# Altium PCB GeekIMUv1.PcbDoc
Units mil, origin at the board's own origin, x right, y up, seen from the top; angles counter-clockwise.
Board outline 1595.03 x 1400.03 mil, 2 copper layers (Top Layer, Bottom Layer); 42 components, 42 nets, 184 pads, 53 vias.
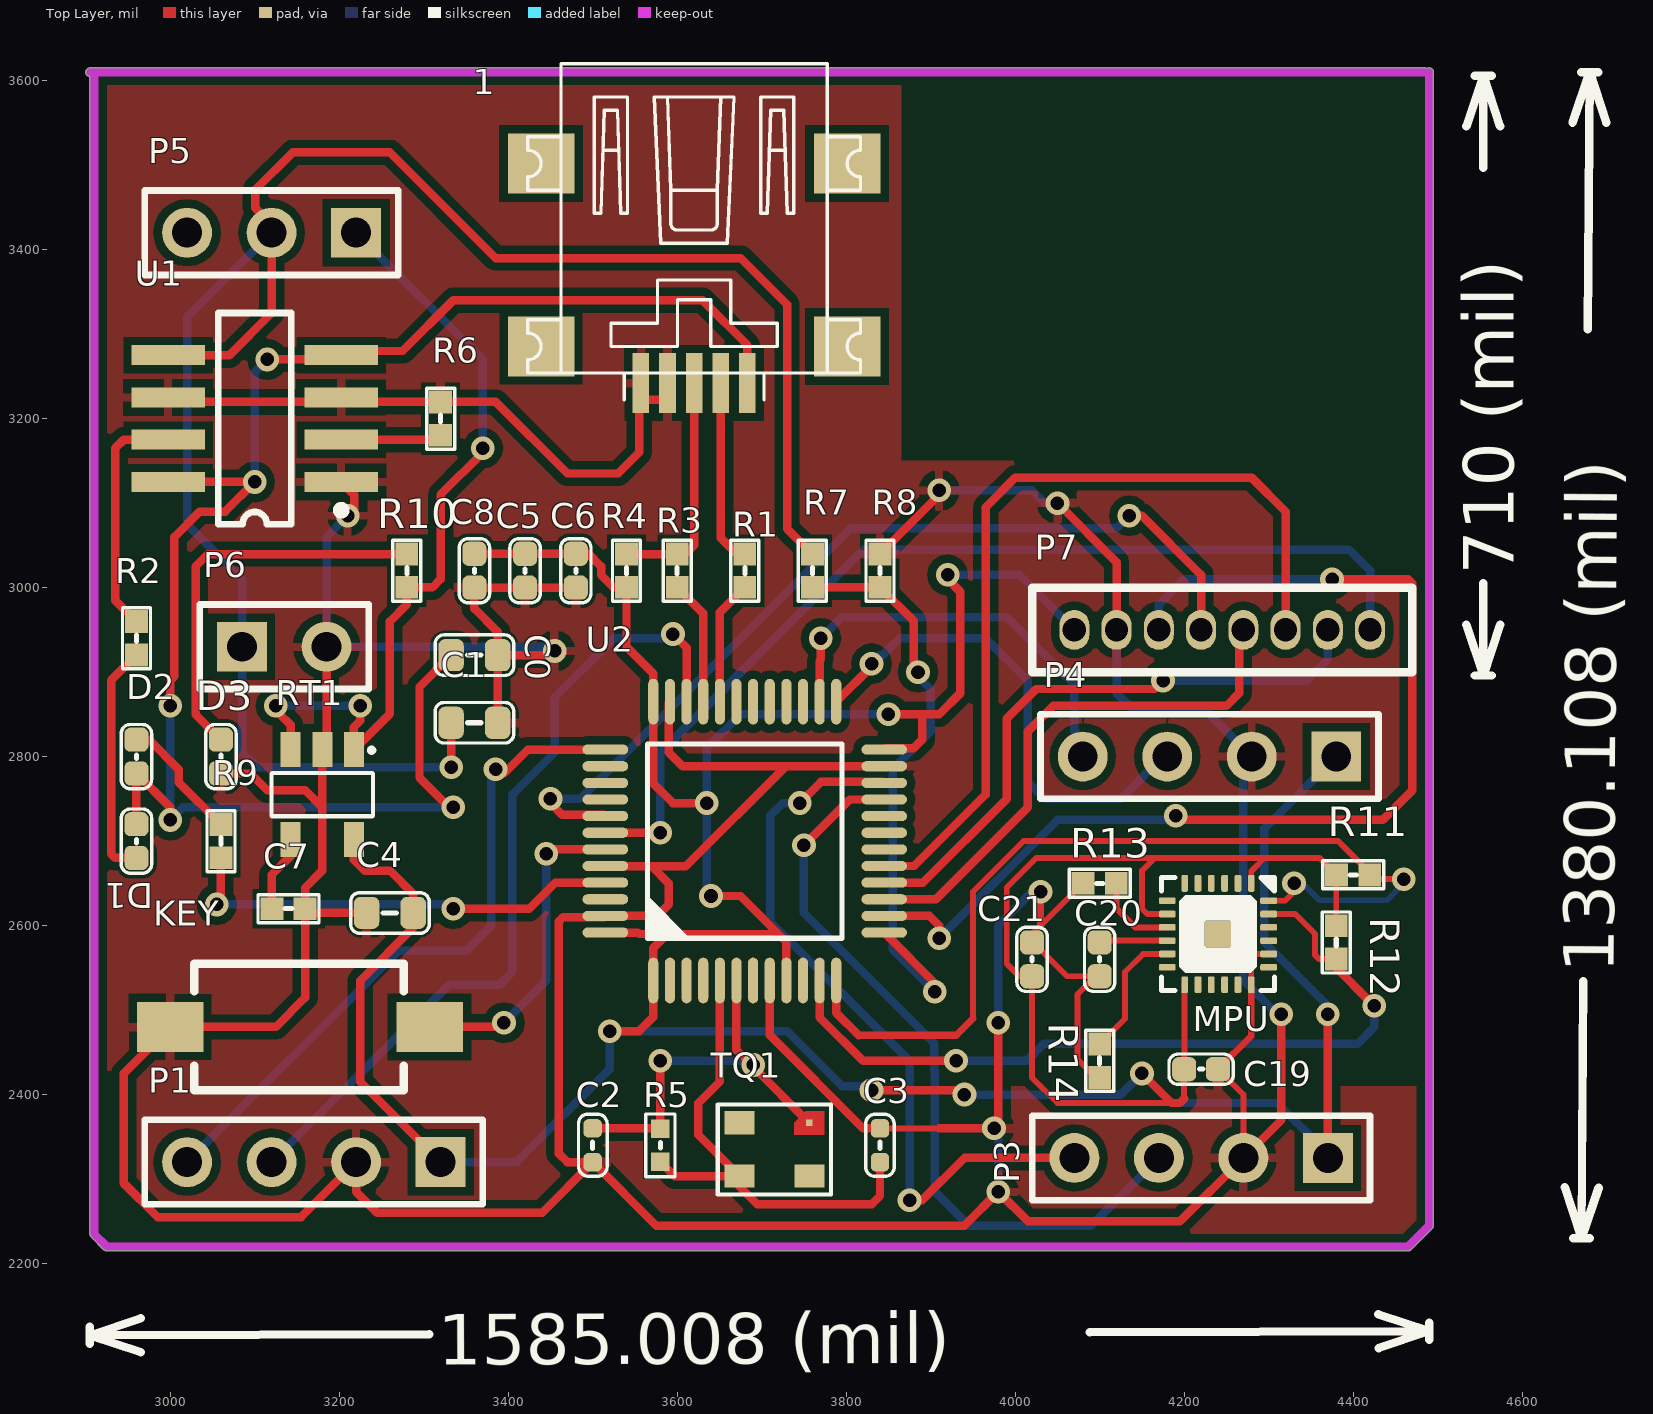
[diagram p0: Top Layer view]
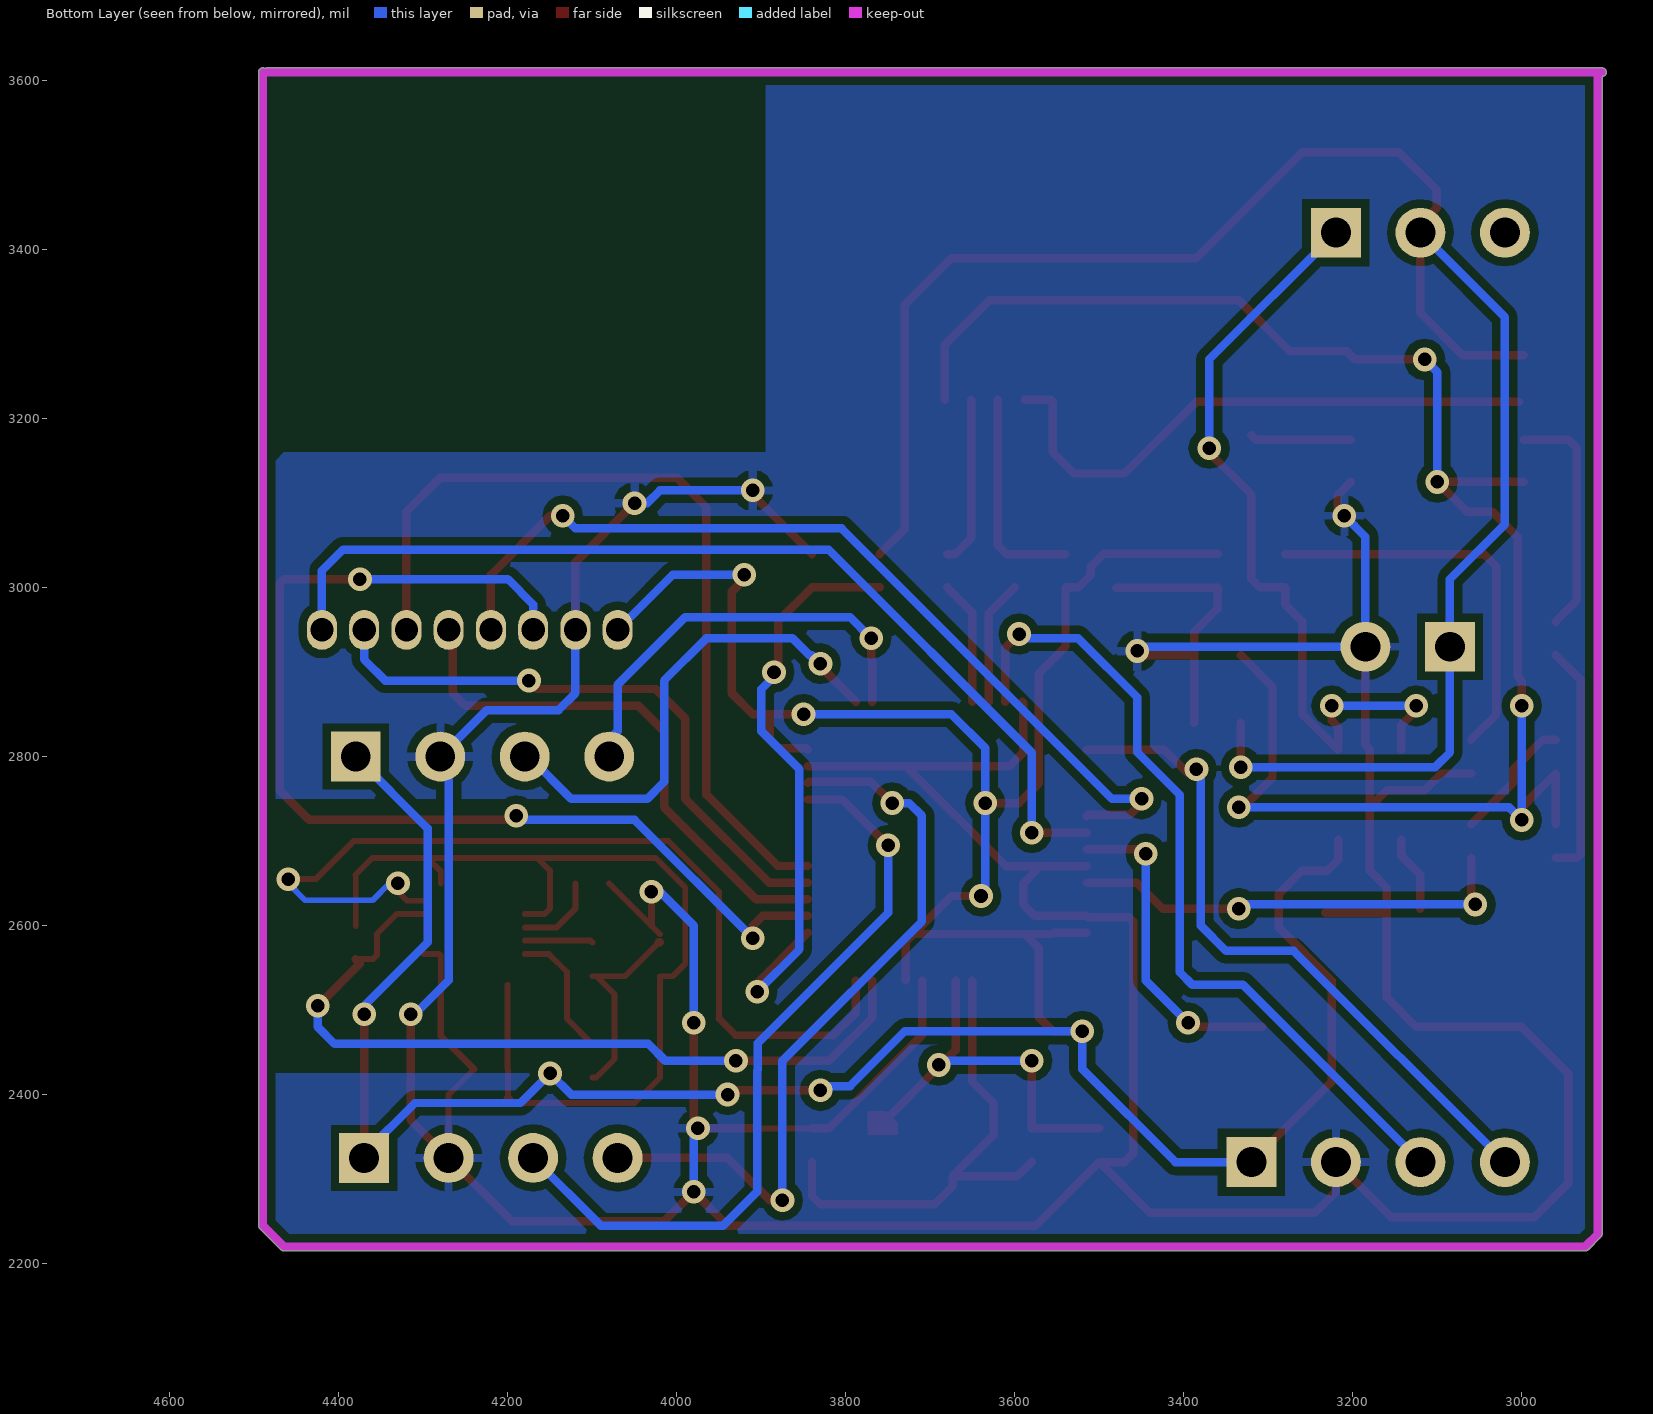
[diagram p1: Bottom Layer view, seen from below]
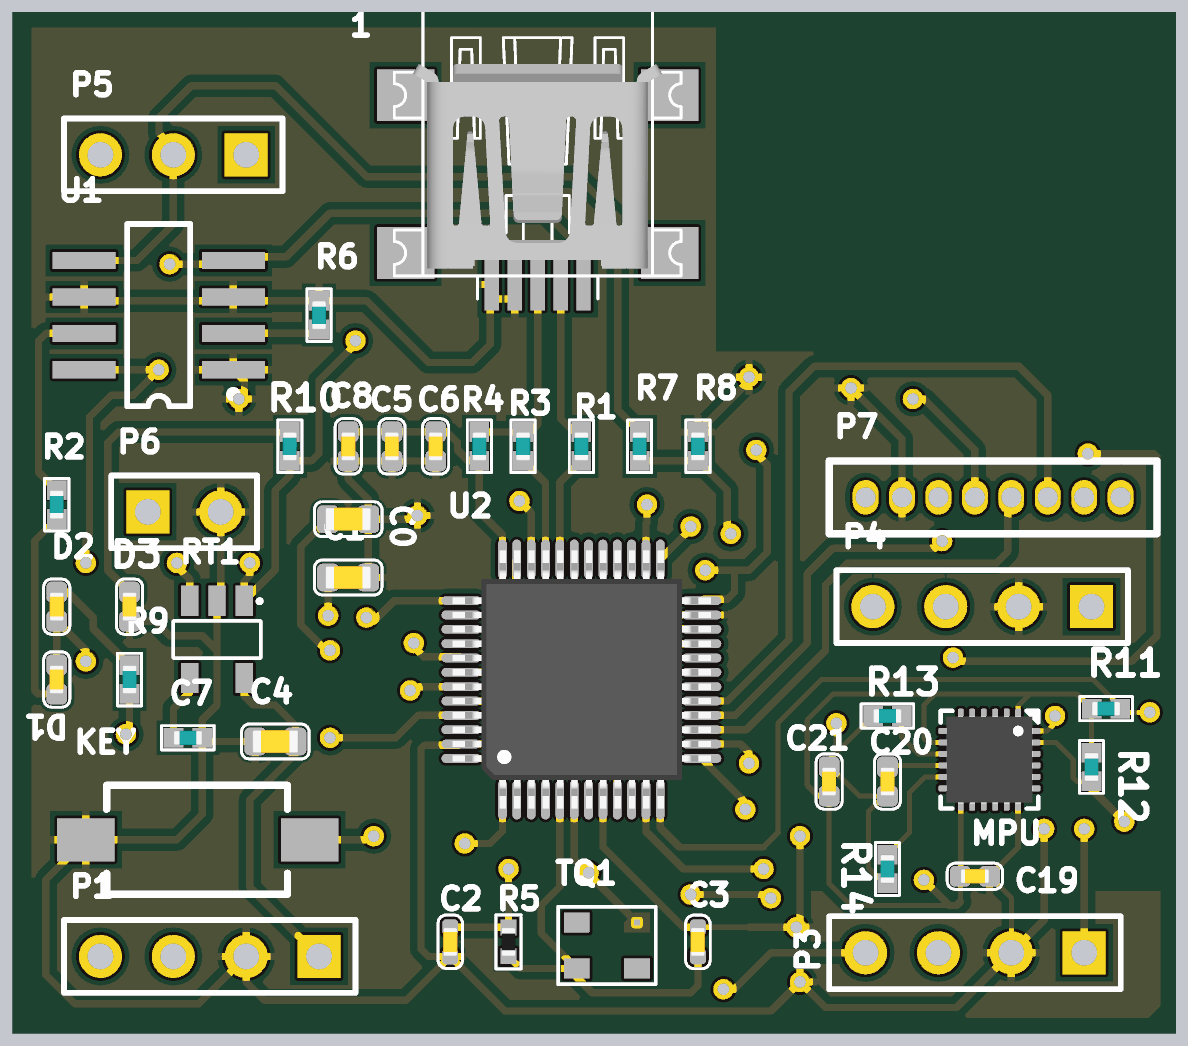
[diagram p2: 3D render of the assembled board from above, using the file's embedded part models]

## Layer stack, top to bottom
Top Layer: signal copper 1.4
Dielectric: dielectric 12.6, FR-4, Dk 4.8
Bottom Layer: signal copper 1.4

## Board outline
2906.47,2231.44 cw(c2910,2235) 2904.99,2235 2904.99,3604.99 cw(c2905,3610) 2905,3615.01 4485,3615.01 cw(c4485,3610) 4487.5,3614.35 cw(c4490,3610) 4495.02,3610 4495.02,2245 cw(c4490,2245) 4493.53,2241.44 4493.55,2241.45 4468.55,2216.45 4468.56,2216.47 cw(c4465,2220) 4465,2214.99 2925,2214.99 cw(c2925,2220) 2921.44,2216.47 2921.45,2216.45

## Design rules (kind name [scope] priority, off if disabled: settings)
Clearance [All] p1: gap=10
PolygonConnect [All] p1: connectstyle=Relief reliefconductorwidth=10 reliefentries=4 polygonreliefangle="90 Angle"
RoomDefinition USB通信 [InComponentClass('USB通信')] p1: confinementstyle=ConfineIn formatcopy=TRUE lockcomponents=FALSE outline 0,0 2000,0 2000,1000 0,1000
RoutingVias [All] p1: holewidth=16 width=28 viastyle="Through Hole" minholewidth=16 minwidth=28 maxholewidth=16 maxwidth=28
SilkscreenOverComponentPads [All] p1: minsilkscreentomaskgap=10
SolderMaskExpansion [All] p1: expansion=4
TestPointUsage [All] p1: valid=0 allowmultiple=FALSE
Testpoint [All] p1: side=3 testpointundercomponent=TRUE minsize=40 maxsize=100 preferedsize=60 minholesize=0 maxholesize=40 preferedholesize=32 testpointgrid=1 style=297 order=0123456789
Width [All] p1: maxlimit=10 minlimit=10 preferedwidth=10
23 further rules are at their usual default settings.

## Components (designator, comment, footprint, x,y, rotation, side; value= is the part's Value field where it differs from the comment)
1 "USB_CONETER" "Mini USB" 3620,3620 r180 top
C0 "Cap" C0603 3360,2920 r0 top
C1 "Cap" C0603 3360,2840 r180 top
C2 "Cap" C0402#1 3500,2340 r90 top
C3 "Cap" C0402#1 3840,2340 r270 top
C4 "Cap" C0603 3260,2615 r0 top
C5 "Cap" C0402#2 3420,3020 r90 top
C6 "Cap" C0402#2 3480,3020 r90 top
C7 "Cap" B0402 3140,2620 r180 top
C8 "Cap" C0402#2 3360,3020 r90 top
C19 "Cap_0603" C0402#2 4220,2430 r180 top
C20 "Cap_0603" C0402#2 4100,2560 r90 top
C21 "Cap_0603" C0402#2 4020,2560 r270 top
D1 "LED1" C0402#2 2960,2700 r270 top
D2 "LED1" C0402#2 2960,2800 r90 top
D3 "LED1" C0402#2 3060,2800 r270 top
KEY "SW-PB" SW-SMD1 3000,2480 r0 top
MPU "MPU925x" QFN_P0.4_24 4240,2590 r270 top
P1 "Header 4" HDR1X4 3320,2320 r180 top
P3 "Header 4" HDR1X4 4370,2325 r180 top
P4 "Header 4" HDR1X4 4380,2800 r180 top
P5 "SWITCH" HDR1X3 3220,3420 r180 top
P6 "POWER" HDR1X2 3085,2930 r0 top
P7 "1.27header6" 1.27header6 4020,3000 r0 top
R1 "Res2" B0402 3680,3020 r270 top
R2 "" B0402 2960,2940 r90 top
R3 "Res2" B0402 3600,3020 r270 top
R4 "Res2" B0402 3540,3020 r270 top
R5 "Res Semi" R0402 3580,2340 r270 top
R6 "" B0402 3320,3200 r90 top
R7 "" B0402 3760,3020 r270 top
R8 "" B0402 3840,3020 r90 top
R9 "" B0402 3060,2700 r90 top
R10 "" B0402 3280,3020 r270 top
R11 "" B0402 4400,2660 r0 top
R12 "" B0402 4380,2580 r270 top
R13 "" B0402 4100,2650 r0 top
R14 "" B0402 4100,2440 r270 top
RT1 "RT9193" SOT23-5 3180,2755 r270 top
TQ1 "HSX321S" DSX321G 3715,2335 r180 top
U1 "tp4056" SOP8 3100,3200 r90 top
U2 "STM32F103C8T6" LQFP_P0.5_48 3680,2700 r90 top

## Footprints (in the part's own frame and the unit in brackets; to place one, negate y for a bottom-side part, rotate by r counter-clockwise, add the part's x,y. Pads: shape width x height; smd on the part's side, far side on the other; paste and mask are expansions set on the pad)
1.27header6 [mm]
  oval 0.9x1.2 hole 0.7: 1(1.27,-1.27) 2(2.54,-1.27) 3(3.81,-1.27) 4(5.08,-1.27) 5(6.35,-1.27) 6(7.62,-1.27) 7(8.89,-1.27) 8(10.16,-1.27)
  silkscreen extent 0,-2.54 11.43,0
B0402 [mil]
  rect 27x27 smd mask+1: 1(-19.68,0) 2(19.69,0)
  silkscreen extent -36,-17 36,17, body extent -20,-10 20,10, height 24
C0402#1 [mm]
  rrect50% 0.55x0.55 smd: 1(-0.508,0) 2(0.508,0)
  silkscreen extent -0.93,-0.43 0.94,0.43, body extent -0.5,-0.25 0.5,0.25, height 0.56
C0402#2 [mm]
  rrect50% 0.724x0.724 smd mask+0.025: 1(-0.508,0) 2(0.508,0)
  silkscreen extent -0.97,-0.46 0.97,0.46, body extent -0.5,-0.25 0.5,0.25, height 0.56
C0603 [mil]
  rrect50% 30x38 smd mask+1: 1(-27.56,0) 2(27.56,0)
  silkscreen extent -46,-24 46,24, body extent -31,-16 32,16, height 22
DSX321G [mm] "https://item.taobao.com/item.htm?id=40018408863&ali_refid=a3_420434_1006:1106509465:N:3225+16MHZ:2b0bf8fa00a527af1bd35d183b0115e7&ali_trackid=1_2b0bf8fa00a527af1bd35d183b0115e7&spm=a230r.1.1957635.9.Ak1QMW&ali_refid=a3_420434_1006:1106509465:N:3225+16MHZ"
  rect 0.2x0.2 smd: 1(-1.05,-0.8)
  rect 0.9x0.7 smd: 2(1.05,-0.8) 3(1.05,0.8) 4(-1.05,0.8)
  Top Layer region: -0.598,-0.446 -1.498,-0.446 -1.498,-1.146 -0.943,-1.146 -0.598,-0.801 -0.598,-0.446
  silkscreen extent -1.7,-1.35 1.7,1.35
HDR1X2 [mm] "Connector; Header; 2 Positio"
  rect 1.5x1.5 hole 0.9: 1(0,0)
  round 1.5 hole 0.9: 2(2.54,0)
  silkscreen extent -1.27,-1.27 3.81,1.27
HDR1X3 [mm] "Connector; Header; 3 Positio"
  rect 1.5x1.5 hole 0.9: 1(0,0)
  round 1.5 hole 0.9: 2(2.54,0) 3(5.08,0)
  silkscreen extent -1.27,-1.27 6.35,1.27
HDR1X4 [mm] "Connector; Header; 4 Positio"
  rect 1.5x1.5 hole 0.9: 1(0,0)
  round 1.5 hole 0.9: 2(2.54,0) 3(5.08,0) 4(7.62,0)
  silkscreen extent -1.27,-1.27 8.89,1.27
LQFP_P0.5_48 [mil]
  oval 54x12 smd: 1(-165,108.27) 2(-165,88.58) 3(-165,68.9) 4(-165,49.21) 5(-165,29.53) 6(-165,9.84) 7(-165,-9.84) 8(-165,-29.53) 9(-165,-49.21) 10(-165,-68.9) 11(-165,-88.58) 12(-165,-108.27) 25(165,-108.27) 26(165,-88.58) 27(165,-68.9) 28(165,-49.21) 29(165,-29.53) 30(165,-9.84) 31(165,9.84) 32(165,29.53) 33(165,49.21) 34(165,68.9) 35(165,88.58) 36(165,108.27)
  oval 12x54 smd: 13(-108.27,-165) 14(-88.58,-165) 15(-68.9,-165) 16(-49.21,-165) 17(-29.53,-165) 18(-9.84,-165) 19(9.84,-165) 20(29.53,-165) 21(49.21,-165) 22(68.9,-165) 23(88.58,-165) 24(108.27,-165) 37(108.27,165) 38(88.58,165) 39(68.9,165) 40(49.21,165) 41(29.53,165) 42(9.84,165) 43(-9.84,165) 44(-29.53,165) 45(-49.21,165) 46(-68.9,165) 47(-88.58,165) 48(-108.27,165)
  silkscreen extent -115,-115 115,115, body extent -177,-178 177,177, height 61
"Mini USB" [mm]
  rect 2x1.8 smd: 0(-4.6,3) 0(-4.6,8.5) 0(4.6,3) 0(4.6,8.5)
  rect 0.5x1.8 smd: 1(-1.6,9.6) 2(-0.8,9.6) 3(0,9.6) 4(0.8,9.6) 5(1.6,9.6)
  silkscreen extent -5,0 5,10.1, body extent -4.95,1.9 4.95,9.05, height 1.95
QFN_P0.4_24 [mil]
  rrect50% 20x8 smd: 1(-60,39.37) 2(-60,23.62) 3(-60,7.87) 4(-60,-7.87) 5(-60,-23.62) 6(-60,-39.37) 13(60,-39.37) 14(60,-23.62) 15(60,-7.87) 16(60,7.87) 17(60,23.62) 18(60,39.37)
  rrect50% 8x20 smd: 7(-39.37,-60) 8(-23.62,-60) 9(-7.87,-60) 10(7.87,-60) 11(23.62,-60) 12(39.37,-60) 19(39.37,60) 20(23.62,60) 21(7.87,60) 22(-7.87,60) 23(-23.62,60) 24(-39.37,60)
  rrect20% 32x32 smd: 25(0,0)
  silkscreen extent -67,-67 67,67, body extent -60,-60 60,60, height 39
R0402 [mm]
  rect 0.55x0.55 smd: 1(-0.5,0) 2(0.5,0)
  silkscreen extent -0.94,-0.44 0.94,0.44, body extent -0.5,-0.25 0.5,0.25, height 0.38
SOP8 [mm] "Small Outline; 8 Leads; Body Width 4.3 mm; Pitch 1.27 m"
  rect 0.6x2.2 smd: 1(-1.905,-2.6) 2(-0.635,-2.6) 3(0.635,-2.6) 4(1.905,-2.6) 5(1.905,2.6) 6(0.635,2.6) 7(-0.635,2.6) 8(-1.905,2.6)
  silkscreen extent -3.17,-2.72 3.17,1.1
SOT23-5 [mm] "SOT23, 5-Leads, Body 3.0x3.0mm (max), Pitch 0.95mm, IPC Medium Densit"
  rect 1.05x0.6 smd: 1(-1.35,0.95) 2(-1.35,0) 3(-1.35,-0.95) 4(1.35,-0.95) 5(1.35,0.95)
  silkscreen extent -1.4,-1.53 0.65,1.55
SW-SMD1 [mm]
  rect 2x1.5 smd: 1(0,0) 2(7.8,0)
  silkscreen extent 0.73,-1.9 7.03,1.9, body extent -0.06,-1.94 7.83,1.91, height 2.5

## Part data
1: library part USB_conect_B
C0 C1 C4 C5 C6 C7 C8 C19 C20 C21: "Capacito"
C2 C3: library part Ca
D1 D2 D3: "Typical RED GaAs LE"
KEY: "Swi"
MPU: "Sensor Motio"
P1 P3 P4: "Header, 4-Pin"
P5: library part "Header 3", "Header, 3-Pin"
P6: library part "Header 2", "Header, 2-Pin"
P7: library part 1.27header
R1 R3 R4: "Resisto"
R2 R6 R7 R8 R9 R10 R11 R12 R13 R14: library part Res2, "Resisto"
R5: "Semiconductor Resisto"
RT1: "Power"
TQ1: "XTAL"
U1: library part Component_1
U2: "STM32 ARM-based 32-bit MCU with 64 Kbytes Flash, 48-pin LQFP, Industrial Temperatur"

## Via types
v1: diameter 28, hole 16, Top Layer to Bottom Layer, 53 vias

## Nets (pads, with @x,y where several pads share a name; then routed paths per layer and width w, separated by ;. In a path a pad name is that pad's centre, name@x,y a point inside that pad or via, vN(x,y) a via of type N, cw(c..) or ccw(c..) an arc to the next point about the centre after c; other vN are vias at no path point)
3.3V: C4.2 C5.2 C6.2 C8.2 C19.2 C21.2 MPU.1 MPU.8 MPU.13 P1.1 P3.1 P4.1 P7.1 R4.2 R11.1 R12.1 RT1.5 U2.1 U2.9 U2.24 U2.36 U2.48 | length 5460.3
  Top Layer w7: MPU.8 4156.38,2613.62 4150,2620 4150,2665 4165,2680 ; 4185,2390 4050,2390 4020,2420 C21.2 4005,2540 3990,2555 3990,2645 4025,2680 4165,2680 ; 4200,2395 C19.2 4200.63,2430.63 MPU.13 ; MPU.1 4279.37,2664.37 4295,2680 ; P3.1 P3.1@4380,2335 ; R12.1 R11.1@4380,2659.68 ; R11.1 4360.31,2680 4295,2680 ; 4165,2680 4295,2680
  Top Layer w10: RT1.5 3217.4,2677.6 3230,2665 3260,2665 3287.56,2637.44 C4.2 3287.56,2597.56 3225,2535 3225,2415 P1.1 ; C8.2 C5.2 C6.2 3495,3040 3510,3025 3510,3015 3524.69,3000.31 R4.2 3540,2930 3571.73,2898.27 U2.36 3571.73,2768.27 3595,2745 v1(3635,2745) ; U2.48 3553.27,2591.73 3555,2590 3588.46,2590 ; v1(3520,2475) 3555,2475 3571.73,2491.73 U2.1 3571.73,2573.27 3588.46,2590 ; v1@3633.46,2635 v1(3640,2635) 3675,2635 3720,2590 ; U2.9 3729.21,2580.79 3720,2590 ; v1(3830,2405) 3930,2405 3935,2400 v1(3940,2400) ; U2.24 3846.73,2810 3880,2810 3890,2820 3890,2850 ; v1(3850,2850) 3890,2850 ; v1(3920,3015) 3920,3010 3935,2995 3935,2875 3910,2850 3890,2850 ; v1(4150,2425) 4185,2390 4195,2390 4200,2395 ; P3.1 v1(4370,2495) ; 3588.46,2590 3720,2590
  Bottom Layer w10: P1.1 3410,2320 3520,2430 v1(3520,2475) 3730,2475 3795,2410 3825,2410 v1(3830,2405) ; v1(3640,2635) 3635,2640 v1(3635,2745) 3635,2810 3675,2850 v1@3840,2850 ; v1(3920,3015) 4005,3015 P7.1 ; v1(3940,2400) 4125,2400 v1(4150,2425) 4185,2390 4310,2390 4370,2330 P3.1 ; v1(4370,2495) 4370,2505 4295,2580 4295,2715 P4.1
ADC: R7.2 R8.1 U2.13 | length 721.8
  Top Layer w10: R7.2 R8.1 3880,2960.32 3880,2905 v1(3885,2900) ; U2.13 3910,2526.73 v1(3905,2521.73)
  Bottom Layer w10: v1(3885,2900) 3885,2895 3900,2880 3900,2830 3855,2785 3855,2571.73 v1(3905,2521.73)
BAT: C1.2 P5.2 P6.1 R7.1 U1.5 | length 2307.4
  Top Layer w10: U1.5 3070,3275 3120,3325 P5.2 ; P5.2@3120,3430 3100.44,3449.56 3100.44,3470.44 3145,3515 3260,3515 3385,3390 3675,3390 3730,3335 3730,3069.68 R7.1 ; v1(3332.44,2787.56) C1.2
  Bottom Layer w10: P5.2 3020,3320 3020,3075 3085,3010 3085,2805 3102.44,2787.56 v1(3332.44,2787.56)
BATOUT: P5.1 R10.2 RT1.1 RT1.3 | length 959.1
  Top Layer w10: v1@3130,2855 3130,2850 3142.6,2837.4 RT1.3 ; v1(3225,2860) 3225,2842.6 3217.4,2835 RT1.1 3260,2850.75 3260,2960 3280,2980 R10.2 3310.31,3000.31 3320,3010 3320,3110 3370,3160 v1(3370,3165)
  Bottom Layer w10: v1@3130,2855 3135,2860 v1(3225,2860) ; P5.1 3370,3270 v1(3370,3165)
  other v1: 3125,2860
GND: 1.4 1.5 C0.2 C1.1 C2.1 C3.1 C4.1 C5.1 C6.1 C7.1 C8.1 C19.1 C20.1 C21.1 D3.2 KEY.1 MPU.18 MPU.20 P1.2 P3.2 P4.2 P6.2 P7.2 R6.2 R8.2 R13.1 R14.2 RT1.2 U1.1 U1.3 U1.6 U2.8 U2.23 U2.35 U2.44 U2.47 | length 7901.3
  Top Layer w7: C3.1 3910,2360 ; C21.1@4020,2589.69 4030,2599.68 R13.1 ; C21.1@4021.3,2580 4061.3,2540 C20.1 4095,2540 4073.75,2518.75 4073.75,2441.96 4095.71,2420 4099.69,2420 R14.2 ; C19.1 4270,2400 P3.2 ; MPU.18@4279.37,2525 4279.37,2564.37 ; 4281.38,2566.38 MPU.20
  Top Layer w8: 4030,2599.68 v1(4030,2640) ; C19.1 4279.37,2469.37 MPU.18@4279.37,2525
  Top Layer w9: 3910,2360 v1(3975,2360) v1@3980,2365
  Top Layer w10: U1.6@3002.95,3219.69 R6.2 3385.31,3219.69 3470,3135 3530,3135 3555,3160 3555,3220.04 3557.01,3222.05 1.4@3588.5,3222.05 ; D3.2 3095,2780 3115,2760 3160,2760 3180,2740 ; P6.2 3185,2813.15 RT1.2 3180,2740 ; U1.1 3217.64,3109.72 3217.64,3092.64 v1(3210,3085) ; C4.1 3164.68,2615 C7.1 ; C1.1 C0.2 ; v1(3455,2925) 3450,2920 C0.2 ; C6.1 C5.1 C8.1 3360,2975.12 3387.56,2947.56 C0.2 ; U2.44 3515.47,2670 3570,2670 ; U2.35 3590,2863.58 3590,2805 3606.42,2788.58 3728.58,2788.58 ; U2.8 3709.53,2470.47 3820,2360 C3.1 ; R8.2 3905,3104.69 3905,3110 v1(3910,3115) ; U2.23 3728.58,2788.58 ; 3910,2360 v1(3975,2360) ; v1@3980,2365 v1(3980,2485) ; C21.1 C21.1@4021.3,2580 ; v1(4050,3100) 4120,3030 P7.2 ; v1(4315,2495) 4315,2370 P3.2 4195,2250 4015,2250 v1(3980,2285) 3940,2245 3575,2245 C2.1 ; C7.1 3159.68,2644.68 3180,2665 3180,2740 ; C7.1 3159.68,2514.68 3125,2480 KEY.1 2945,2425 2945,2295 2985,2255 3155,2255 P1.2 3220,2285 3245,2260 3440,2260 C2.1 ; C2.1 3470,2320 3460,2330 3460,2605 3465,2610 3513.58,2610 U2.47 3576.42,2611.42 3590,2625 3590,2650 3570,2670 ; 3570,2670 3610,2670 3728.58,2788.58
  Bottom Layer w10: v1(3210,3085) 3185,3060 P6.2 3450,2930 v1(3455,2925) ; v1(3910,3115) 4020,3115 4035,3100 v1(4050,3100) ; v1(3975,2360) 3980,2365 v1(3980,2285) ; v1(3980,2485) 3980,2600 4020,2640 v1(4030,2640) ; P7.2 4120,2875 4140,2855 4225,2855 P4.2 4270,2790 4270,2535 4315,2490 v1(4315,2495)
KEY: KEY.2 U2.43 | length 382.8
  Top Layer w10: KEY.2 3390,2480 v1(3395,2485) ; v1(3445,2685) 3450.16,2690.16 U2.43
  Bottom Layer w10: v1(3395,2485) 3445,2535 v1(3445,2685)
LED: R9.1 U2.45 | length 532.2
  Top Layer w10: v1(3055,2625) 3060,2630 R9.1 ; v1(3335,2620) 3425,2620 3455.79,2650.79 U2.45
  Bottom Layer w10: v1(3055,2625) 3330,2625 v1(3335,2620)
M_CSM: MPU.22
M_INTM: MPU.12
M_SDO: MPU.9 R13.2 | length 99.3
  Top Layer w7: R13.2 4119.69,2620.31 4142.13,2597.87 MPU.9
Net1_2: 1.2 R1.1 | length 199.8
  Top Layer w10: 1.2@3651.5,3222.05 3651.5,3058.5 3670.32,3039.68 R1.1
Net1_3: 1.3 R3.1 R4.1 | length 256.3
  Top Layer w10: R4.1 R3.1 3609.68,3039.68 3620,3050 1.3@3620,3222.05
NetC7_2: C7.2 RT1.4 | length 91.1
  Top Layer w10: C7.2 3120.31,2660.31 3142.6,2682.6 RT1.4
NetD1_2: D1.2 R2.1 | length 279.8
  Top Layer w10: D1.2 2935,2680 2930,2685 2930,2890.32 R2.1
NetD2_2: D2.2 R9.2 | length 150.5
  Top Layer w10: D2.2 2975,2820 3010,2785 3010,2769.69 R9.2
NetD3_1: D3.1 R10.1 | length 473.5
  Top Layer w10: D3.1 3030,2850 3030,3025 3044.68,3039.68 R10.1
NetMPU_11: MPU.11 R14.1 | length 156.6
  Top Layer w7: R14.1 4130,2489.68 4130,2545 4151.38,2566.38 MPU.11
NetR2_2: R2.2 U1.7 | length 282.5
  Top Layer w10: R2.2 2935,2984.69 2935,3165 2945,3175 U1.7
NetR6_1: R6.1 U1.2 | length 119.8
  Top Layer w10: U1.2 3314.68,3175 R6.1
NRF_CE: P7.3 U2.14 | length 1310.9
  Top Layer w10: U2.14 3898.58,2611.42 3910,2600 v1(3910,2585) ; v1(4190,2730) 4195,2725 4435,2725 4470,2760 4470,3005 4465,3010 v1(4375,3010)
  Bottom Layer w10: v1(3910,2585) 4050,2725 4185,2725 v1(4190,2730) ; P7.3 4170,2980 4200,3010 v1(4375,3010)
NRF_CSN: P7.4 U2.41 | length 1079.2
  Top Layer w10: v1(3450,2750) 3450,2745 3463.79,2731.21 3513.32,2731.21 U2.41 ; v1(4135,3085) 4150,3085 4220,3015 P7.4
  Bottom Layer w10: v1(3450,2750) 3485,2750 3805,3070 4120,3070 v1(4135,3085)
NRF_IRQ: P7.8 U2.42 | length 1179.6
  Top Layer w10: U2.42 3579.84,2709.84 v1(3580,2710)
  Bottom Layer w10: v1(3580,2710) 3580,2804.54 3820.46,3045 4395,3045 4420,3020 P7.8
NRST: U2.7
OSC_1: C3.2 R5.2 TQ1.3 U2.5 | length 594.3
  Top Layer w10: R5.2 3596.81,2303.5 TQ1.3 ; U2.5 3650.47,2415.47 3625,2390 3625,2352.17 TQ1.3 ; C3.2 3840,2280 3830,2270 3695,2270 3673.66,2291.34 TQ1.3
OSC_2: C2.2 R5.1 TQ1.1 U2.6 | length 476.3
  Top Layer w10: C2.2 R5.1@3579.68,2360 ; R5.1 v1(3580,2440) ; U2.6 3670.16,2452.68 3688.92,2433.92 TQ1.1
  Bottom Layer w10: v1(3580,2440) 3685,2440 v1(3690,2435)
REG: C20.2 MPU.10 | length 80.9
  Top Layer w7: C20.2 4102.13,2582.13 MPU.10
RXD: U2.31
SCL: P3.3 U2.21 | length 906.4
  Top Layer w10: v1(3750,2695) 3804.21,2749.21 U2.21
  Bottom Layer w10: v1(3750,2695) 3750,2615 3904,2461 3904,2429.23 3905,2428.23 3905,2285 3945,2245 4090,2245 P3.3
SCL1: P4.3 U2.25 | length 594.6
  Top Layer w10: U2.25 3830.2,2906.93 3830.2,2909.8 v1(3830,2910)
  Bottom Layer w10: v1(3830,2910) 3840,2920 3843.27,2920 3863.27,2940 3965,2940 4015,2890 4015,2770 4035,2750 4125,2750 4175,2800 P4.3
SCL2: MPU.23 R12.2 U2.11 | length 957.7
  Top Layer w7: MPU.23 4331.38,2613.62 4355,2590 4355,2565 4359.69,2560.31 R12.2
  Top Layer w10: U2.11 3768.58,2491.42 3820,2440 v1(3930,2440) ; R12.2 4375,2555.31 4375,2555 v1(4425,2505)
  Bottom Layer w10: v1(3930,2440) 4013.73,2440 4033.73,2460 4405,2460 4425,2480 v1(4425,2505)
SDA: P3.4 U2.22 | length 891.1
  Top Layer w10: v1(3745,2745) 3770,2770 3843.9,2770 U2.22 ; v1(3875,2275) 3890,2275 3940,2325 P3.4
  Bottom Layer w10: v1(3745,2745) 3725,2745 3710,2730 3710,2605 3875,2440 v1(3875,2275)
SDA1: P4.4 U2.26 | length 508.2
  Top Layer w10: U2.26 3768.58,2913.58 3770,2915 v1(3770,2940)
  Bottom Layer w10: v1(3770,2940) 3795,2965 3990,2965 4070,2885 4070,2830 4080,2820 P4.4
SDA2: MPU.24 R11.2 U2.12 | length 1118.8
  Top Layer w7: 3950,2490 3950,2640 4010,2700 4382.16,2700 4388.16,2694 4427.16,2655 v1(4460,2655) ; MPU.24 4319.37,2629.37 4330,2640 v1(4330,2650)
  Top Layer w8: 3930,2470 3950,2490
  Top Layer w9: 3815,2470 3930,2470
  Top Layer w10: U2.12 3788.27,2496.73 3815,2470
  Bottom Layer w7: v1(4330,2650) 4340,2650 4360,2630 4440,2630 4460,2650 v1(4460,2655)
SPI1_CLK: P7.5 U2.15 | length 650.8
  Top Layer w10: U2.15 3906.1,2631.1 4015,2740 4015,2830 4045,2860 4250,2860 4265,2875 4265,2945 P7.5
SPI1_MISO: P7.7 U2.16 | length 725.1
  Top Layer w10: U2.16 3890.79,2650.79 3990,2750 3990,2845 4025,2880 4165,2880 v1(4175,2890)
  Bottom Layer w10: v1(4175,2890) 4345,2890 4370,2915 P7.7
SPI1_MOSI: P7.6 U2.17 | length 1021.1
  Top Layer w10: U2.17 3880.47,2670.47 3965,2755 3965,3095 4000,3130 4280,3130 4320,3090 P7.6
SWCLK: P1.4 U2.37 | length 806.8
  Top Layer w10: v1(3385,2785) 3390,2780 3395,2780 3423.27,2808.27 U2.37
  Bottom Layer w10: P1.4 3270,2570 3350,2570 3380,2600 3380,2780 v1(3385,2785)
SWDIO: P1.3 U2.34 | length 981.6
  Top Layer w10: v1(3595,2945) 3611.1,2928.9 U2.34
  Bottom Layer w10: P1.3 3330,2530 3390,2530 3405,2545 3405,2755 3455,2805 3455,2870 3525,2940 3590,2940 v1(3595,2945)
TXD: U2.30
USB_DM: R1.2 U2.32 | length 147.5
  Top Layer w10: U2.32 3650.47,2970.79 R1.2
USB_DP: R3.2 U2.33 | length 148.1
  Top Layer w10: R3.2 3630.79,2969.53 U2.33
VCC: 1.1 C0.1 D1.1 D2.1 U1.4 U1.8 | length 2084.3
  Top Layer w10: D1.1 D2.1 3000,2740 v1(3000,2725) ; U1.8 v1(3100,3125) 3065,3090 3035,3090 3005,3060 3005,2895 3000,2890 v1(3000,2860) ; v1(3115,3270) 3197.36,3270 U1.4 3207.36,3280 3275,3280 3335,3340 3630,3340 3682.99,3287.01 1.1@3682.99,3222.05 ; C0.1 3295,2882.56 3295,2775 3330,2740 v1(3335,2740)
  Bottom Layer w10: v1(3000,2860) v1(3000,2725) 3015,2740 v1(3335,2740) ; v1(3100,3125) 3100,3255 v1(3115,3270)
pads on no net: 1.0 MPU.2 MPU.3 MPU.4 MPU.5 MPU.6 MPU.7 MPU.14 MPU.15 MPU.16 MPU.17 MPU.19 MPU.21 MPU.25 P5.3 TQ1.2 TQ1.4 U2.2 U2.3 U2.4 U2.10 U2.18 U2.19 U2.20 U2.27 U2.28 U2.29 U2.38 U2.39 U2.40 U2.46

## Polygon pours and split planes (outlines as drawn)
GND on Top Layer "Keep-Out Layer-No Net" (solid, remove dead copper, pour order 2): 2870,3680 2870,2225 2850,2205 2875,2180 4585,2180 4585,2340 4535,2390 4515,2410 3970,2410 3970,2750 4535,2750 4535,3105 4515,3125 4490,3150 3865,3150 3865,3680 2860,3680
GND on Bottom Layer "Keep-Out Layer-No Net" (solid, remove dead copper, pour order 4): 2815,3665 2815,2240 2860,2195 2895,2160 4510,2160 4510,2400 4520,2410 4505,2425 3950,2425 3950,2750 3945,2755 3950,2750 4540,2750 4540,3085 4505,3120 4465,3160 3895,3160 3895,3645 3885,3655 3880,3660 2815,3660

## Keep-outs
Keep-Out Layer:
  lines w10: 2905,3610 2915,3610 4485,3610 ; 2910,3510 2910,3605 ; 2910,3530 2910,2235 2925,2220 4465,2220 4490,2245 4490,3530 4490,3610

## Silkscreen, mask and mechanical layers (free items; w line width, h text height)
Top Overlay:
  lines w10: 2904.97,2125 2905.03,2105 ; 2964.94,2135.19 2905,2115 ; 2965.06,2095.19 2905,2115 ; 3306.62,2116.27 2905,2115 ; 4088.38,2118.73 4490,2120 ; 4429.94,2139.81 4490,2120 ; 4430.06,2099.81 4490,2120 ; 4489.97,2130 4490.03,2110 ; 4534.01,2955.93 4554.01,2895.93 ; 4534.01,3545.93 4554.01,3605.93 ; 4544.01,2895.93 4564.01,2895.93 ; 4544.01,3605.93 4564.01,3605.93 ; 4554.01,3005 4554.01,2895.93 ; 4554.01,3496.85 4554.01,3605.93 ; 4574.01,2955.93 4554.01,2895.93 ; 4574.01,3545.93 4554.01,3605.93 ; 4650.64,2290.07 4670.22,2229.93 ; 4659.58,3550.14 4680,3610 ; 4660.22,2230 4680.22,2229.86 ; 4670,3610.07 4690,3609.93 ; 4672.37,2534.09 4670.22,2229.93 ; 4677.84,3305.83 4680,3610 ; 4690.64,2289.78 4670.22,2229.93 ; 4699.57,3549.86 4680,3610
  text "710 (mil)" at 4590,3015 h60 r90
  text "1380.108 (mil)" at 4708.43,2543.84 h60 r89.59
  text "1585.008 (mil)" at 3316.74,2080.31 h60 r0.18